# Altium PCB AMPURR.PcbDoc (part 4 of 6)
Units mm, origin at the board's own origin, x right, y up, seen from the top; angles counter-clockwise.
Board outline 100 x 100 mm, 4 copper layers (Top Layer, GND, VDD, Bottom Layer), stack 1.586 mm thick; 522 components, 281 nets, 1527 pads, 2431 vias.
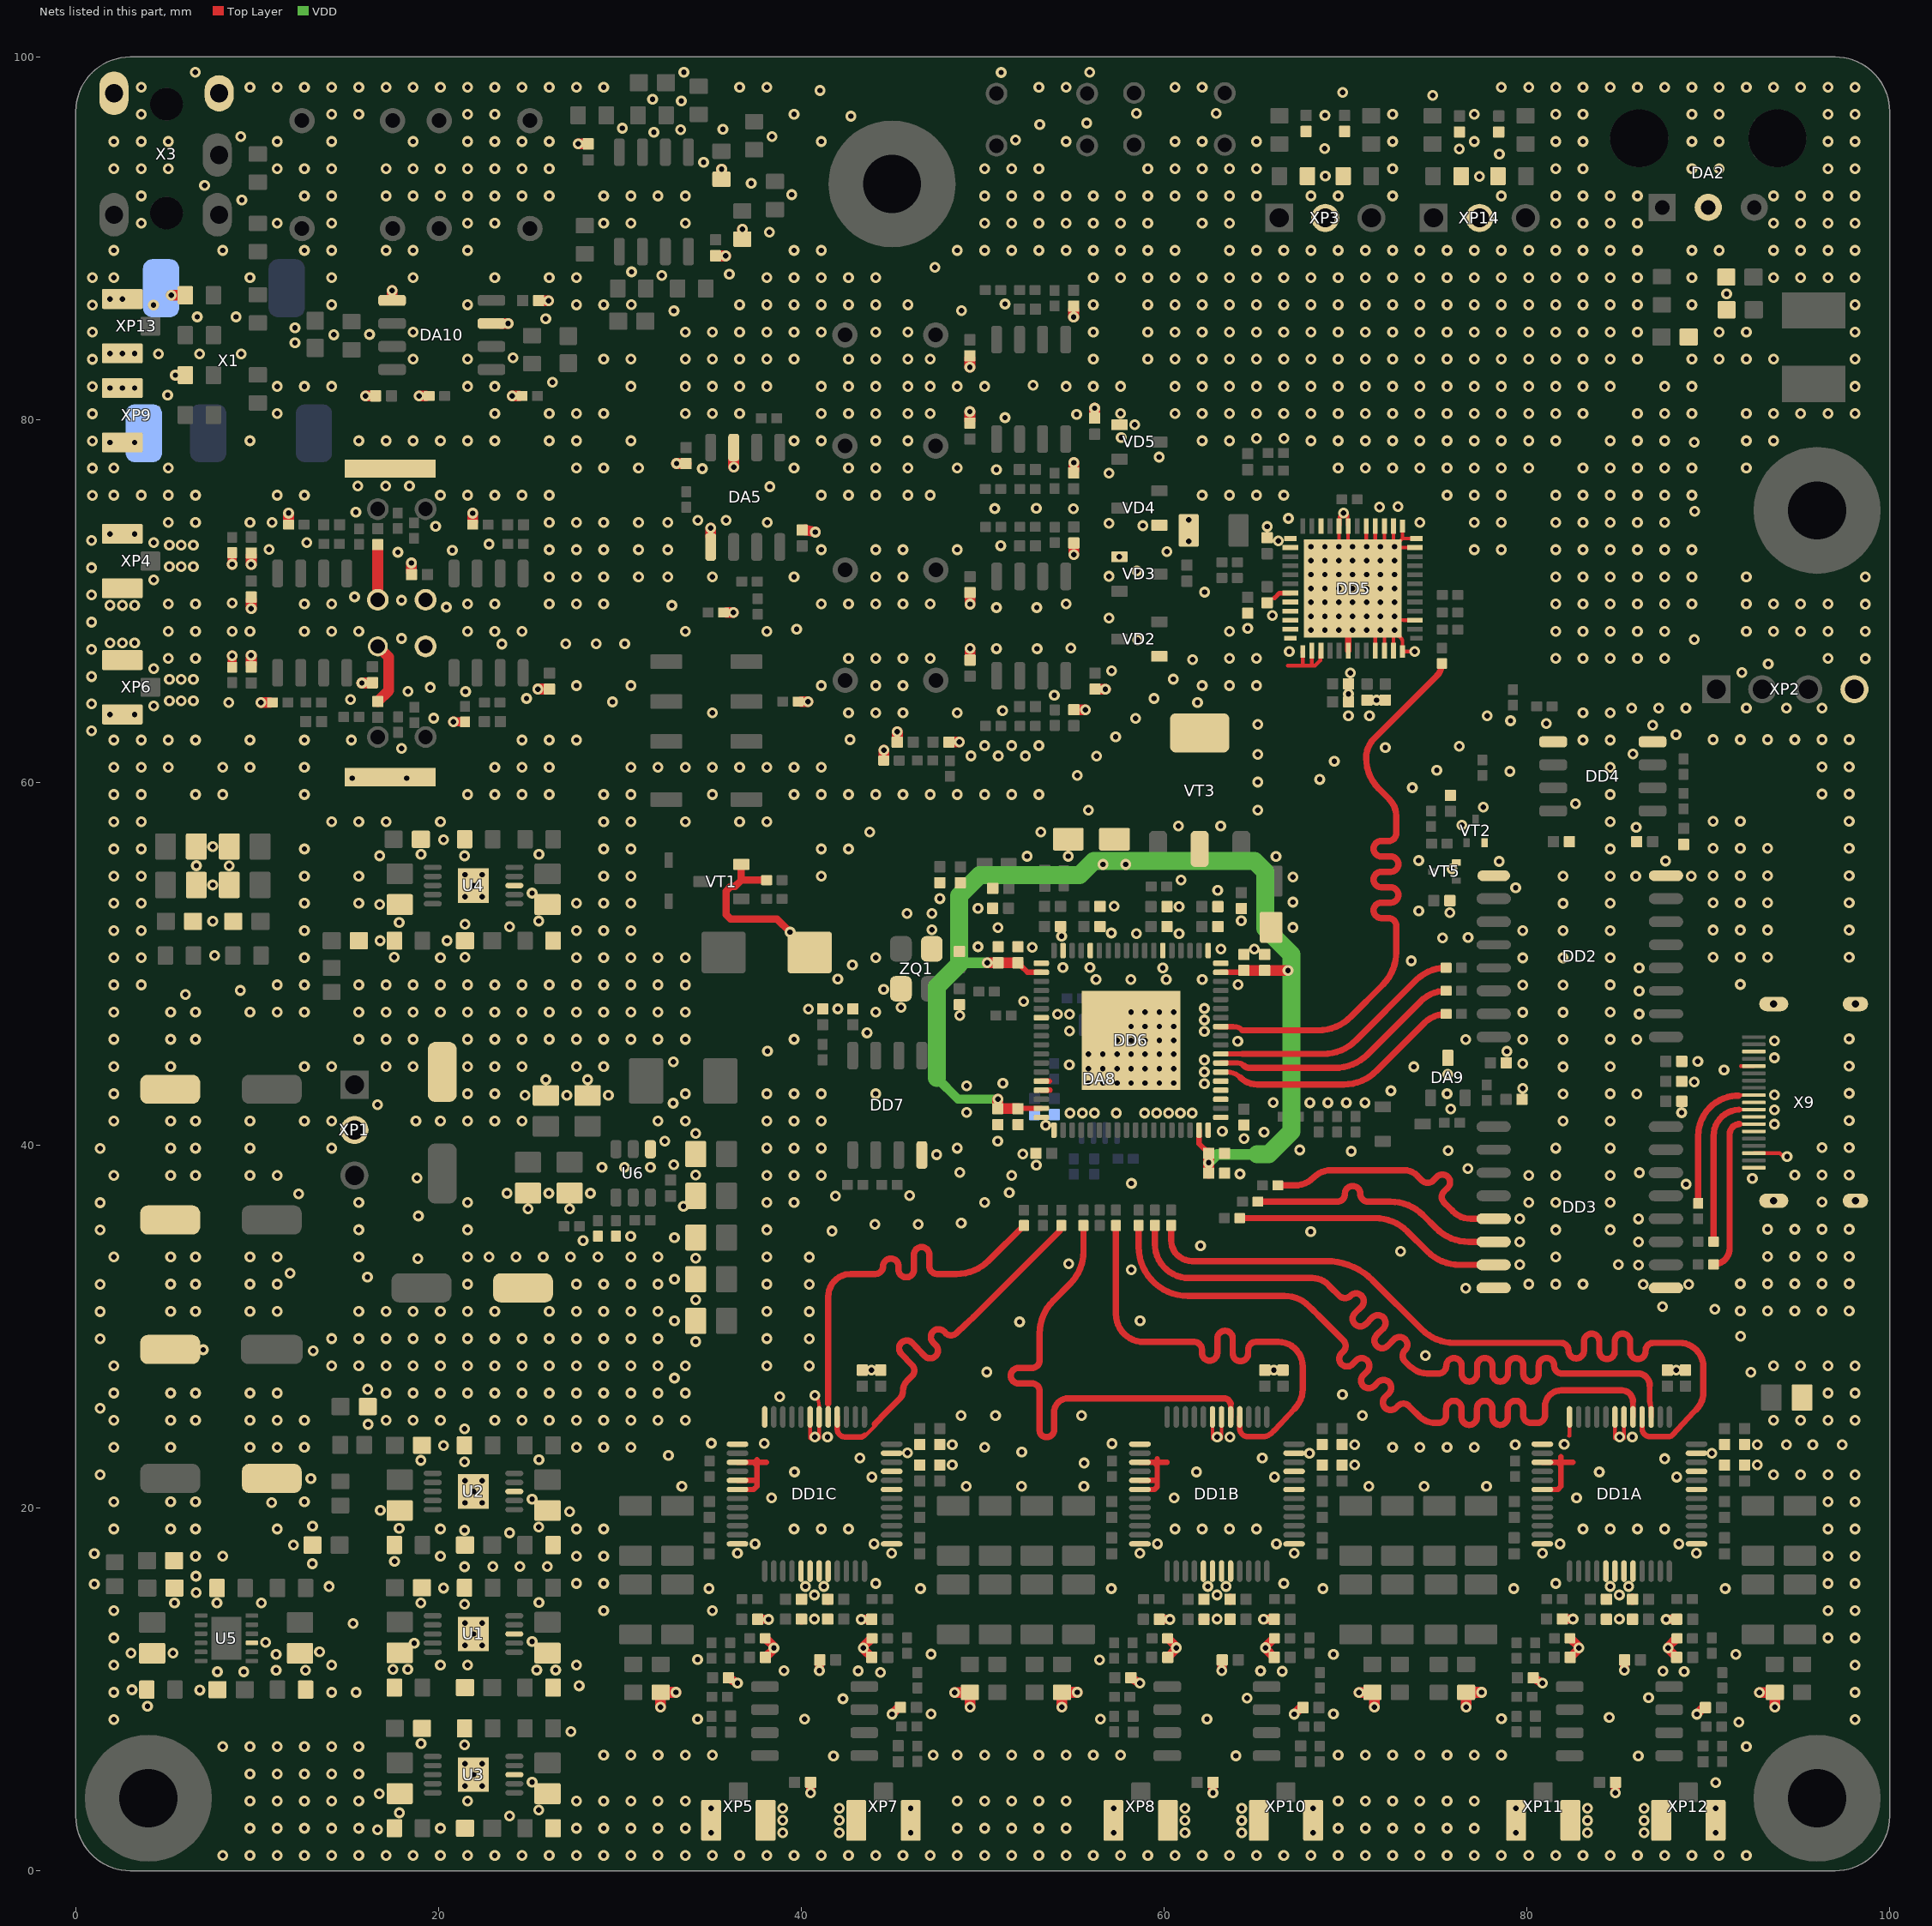
[diagram p5: the nets of this part, all layers, seen from the top]

## Via types
v1: diameter 0.6, hole 0.3, Top Layer to Bottom Layer, tented both sides, 2431 vias

## Nets (pads, with @x,y where several pads share a name; then routed paths per layer and width w, separated by ;. In a path a pad name is that pad's centre, name@x,y a point inside that pad or via, vN(x,y) a via of type N, cw(c..) or ccw(c..) an arc to the next point about the centre after c; other vN are vias at no path point) (continued)
DAC_BCK_2: DD1A.3 R89.1 | length 45.2
  Top Layer w0.3: 86.776,26.753 86.776,25.936 ccw(c87.406,25.936) 86.788,25.814 86.856,25.469 DD1A.3@86.856,25.019
  Top Layer w0.35: R89.1@59.491,35.576 59.491,34.561 ccw(c61.374,34.561) 61.374,32.678 68.16,32.678 68.162,32.678 cw(c68.161,31.417) 69.053,32.309 69.055,32.307 69.12,32.242 69.669,31.693 ccw(c69.97,31.993) 70.27,31.693 70.284,31.706 cw(c70.584,31.406) 70.885,31.706 cw(c70.584,31.406) 70.885,31.105 70.518,30.738 ccw(c70.818,30.438) 70.518,30.137 ccw(c70.818,30.438) 71.119,30.137 71.486,30.504 cw(c71.786,30.204) 72.087,30.504 cw(c71.786,30.204) 72.087,29.903 71.72,29.536 ccw(c72.021,29.236) 71.72,28.935 ccw(c72.021,29.236) 72.321,28.935 72.688,29.302 cw(c72.988,29.002) 73.289,29.302 cw(c72.988,29.002) 73.289,28.701 73.275,28.688 ccw(c73.576,28.387) 73.275,28.086 73.536,27.826 73.537,27.825 73.936,27.545 ccw(c74.533,28.821) 74.114,27.476 ccw(c74.533,28.821) 74.501,27.413 ccw(c74.533,28.821) 74.533,27.412 74.676,27.412 75.132,27.412 ccw(c75.132,27.837) 75.557,27.837 cw(c75.982,27.837) 75.982,28.262 cw(c75.982,27.837) 76.407,27.837 76.407,27.396 ccw(c76.832,27.396) 76.832,26.971 ccw(c76.832,27.396) 77.257,27.396 77.257,27.849 cw(c77.682,27.849) 77.682,28.274 cw(c77.682,27.849) 78.107,27.849 78.107,27.396 ccw(c78.532,27.396) 78.532,26.971 ccw(c78.532,27.396) 78.957,27.396 78.957,27.849 cw(c79.382,27.849) 79.382,28.274 cw(c79.382,27.849) 79.807,27.849 79.807,27.396 ccw(c80.232,27.396) 80.232,26.971 ccw(c80.232,27.396) 80.657,27.396 80.657,27.849 cw(c81.082,27.849) 81.082,28.274 cw(c81.082,27.849) 81.507,27.849 81.507,27.837 ccw(c81.932,27.837) 81.932,27.412 82.782,27.412 82.957,27.412 86.117,27.412 cw(c86.117,26.753) 86.776,26.753
DAC_BCK_3: DD3.6 R86.1 | length 14.7
  Top Layer w0.35: R86.1@65.172,36.889 69.369,36.889 69.544,36.889 ccw(c69.544,37.314) 69.969,37.314 69.969,37.327 cw(c70.394,37.327) 70.394,37.752 cw(c70.394,37.327) 70.819,37.327 70.819,37.314 ccw(c71.244,37.314) 71.244,36.889 71.899,36.889 72.484,36.889 cw(c72.484,34.349) 74.28,36.145 75.006,35.418 ccw(c76.802,37.214) 76.802,34.674 DD3.6@78.171,34.674
DAC_DIN_0: DD1C.4 R94.1 | length 22.8
  Top Layer w0.2: 43.27,23.918 ccw(c43.27,24.357) 43.581,24.046 44.109,24.575
  Top Layer w0.3: DD1C.4@41.98,25.019 41.98,24.344 ccw(c42.407,24.344) 42.407,23.918 43.27,23.918 ccw(c43.27,24.215) 43.48,24.005
  Top Layer w0.35: 44.055,24.63 44.692,25.297 45.425,26.03 ccw(c44.998,26.457) 45.602,26.457 cw(c46.38,26.457) 45.83,27.007 45.972,27.149 46.096,27.273 46.104,27.281 ccw(c45.803,27.582) 46.112,27.874 45.504,28.516 cw(c45.813,28.808) 45.521,29.117 cw(c45.813,28.808) 46.121,29.1 46.8,28.384 ccw(c47.109,28.676) 47.401,28.367 ccw(c47.109,28.676) 47.417,28.968 47.255,29.139 cw(c47.564,29.431) 47.272,29.74 cw(c47.564,29.431) 47.873,29.723 47.944,29.648 ccw(c48.253,29.94) 48.545,29.631 49.067,30.125 49.194,30.246 49.501,30.536 54.183,35.218 ccw(c53.825,35.576) R94.1@54.331,35.576
DAC_DIN_1: DD1B.4 R91.1 | length 27.8
  Top Layer w0.3: DD1B.4@64.168,25.019 64.168,24.388 ccw(c64.625,24.388) 64.625,23.93 65.427,23.93 ccw(c65.427,24.656) 65.94,24.143 66.074,24.277 67.196,25.474
  Top Layer w0.35: 57.347,30.684 ccw(c58.877,30.684) 58.877,29.155 60.371,29.155 61.659,29.155 cw(c61.659,28.73) 62.084,28.73 62.084,28.548 ccw(c62.509,28.548) 62.509,28.123 ccw(c62.509,28.548) 62.934,28.548 62.934,29.344 cw(c63.359,29.344) 63.359,29.769 cw(c63.359,29.344) 63.784,29.344 63.784,28.517 ccw(c64.209,28.517) 64.209,28.092 ccw(c64.209,28.517) 64.634,28.517 64.634,28.73 cw(c65.059,28.73) 65.059,29.155 65.234,29.155 66.293,29.155 cw(c66.293,27.804) 67.644,27.804 67.644,26.556 cw(c66.113,26.556) 67.196,25.474 ; 57.347,30.685 57.342,32.297 cw(c58.067,32.301) 57.342,32.302 57.347,35.451 R91.1@57.347,35.576
DAC_DIN_2: DD1A.4 R88.1 | length 45.5
  Top Layer w0.3: DD1A.4@86.356,25.019 86.356,24.372 ccw(c86.796,24.372) 86.796,23.933 87.822,23.933 ccw(c87.822,24.233) 88.043,24.03 89.473,25.583
  Top Layer w0.35: R88.1@60.388,35.576 60.388,34.765 ccw(c61.541,34.765) 61.541,33.613 68.932,33.613 cw(c68.932,29.97) 71.508,32.546 74.206,29.847 ccw(c76.002,31.643) 76.002,29.103 78.439,29.103 81.872,29.103 cw(c81.872,28.678) 82.297,28.678 82.297,28.673 ccw(c82.722,28.673) 82.722,28.248 ccw(c82.722,28.673) 83.147,28.673 83.147,29.182 cw(c83.572,29.182) 83.572,29.607 cw(c83.572,29.182) 83.997,29.182 83.997,28.633 ccw(c84.422,28.633) 84.422,28.208 ccw(c84.422,28.633) 84.847,28.633 84.847,29.182 cw(c85.272,29.182) 85.272,29.607 cw(c85.272,29.182) 85.697,29.182 85.697,28.633 ccw(c86.122,28.633) 86.122,28.208 ccw(c86.122,28.633) 86.547,28.633 86.547,28.678 cw(c86.972,28.678) 86.972,29.103 87.147,29.103 88.413,29.103 cw(c88.413,27.795) 89.338,28.72 cw(c88.403,27.77) 89.736,27.77 89.736,26.382 cw(c88.391,26.382) 89.342,25.431
DAC_DIN_3: DD3.5 R85.1 | length 14.7
  Top Layer w0.35: R85.1@66.272,37.785 67.192,37.785 ccw(c67.192,39.265) 68.239,38.219 cw(c69.221,37.236) 69.221,38.625 73.219,38.625 73.221,38.625 cw(c73.221,37.582) 73.96,38.319 74.107,38.171 74.22,38.059 74.231,38.048 ccw(c74.531,38.348) 74.832,38.048 75.042,38.258 cw(c75.343,37.958) 75.643,38.258 cw(c75.343,37.958) 75.643,37.657 75.433,37.447 ccw(c75.734,37.146) 75.433,36.846 75.767,36.512 75.891,36.388 ; 75.891,36.388 75.924,36.354 ; 75.929,36.349 ccw(c76.907,37.327) 76.907,35.944 DD3.5@78.171,35.944
DAC_LRCK_0: DD1C.5 R96.1 | length 22.7
  Top Layer w0.2: DD1C.5@41.48,25.019 41.48,25.753
  Top Layer w0.35: 41.48,25.753 41.48,31.649 cw(c42.735,31.649) 42.249,32.806 cw(c42.735,31.649) 42.424,32.865 42.735,32.904 44.083,32.904 ccw(c44.083,33.329) 44.508,33.329 cw(c44.933,33.329) 44.933,33.754 cw(c44.933,33.329) 45.358,33.329 45.358,33.144 ccw(c45.783,33.144) 45.783,32.719 ccw(c45.783,33.144) 46.208,33.144 46.208,33.958 cw(c46.633,33.958) 46.633,34.383 cw(c46.633,33.958) 47.058,33.958 47.058,33.329 ccw(c47.483,33.329) 47.483,32.904 48.508,32.904 48.546,32.904 ccw(c48.546,35.444) 50.342,33.648 R96.1@52.27,35.576
DAC_LRCK_1: DD1B.5 R93.1 | length 27.8
  Top Layer w0.3: DD1B.5@63.668,25.019 63.668,25.753
  Top Layer w0.35: 53.139,24.658 53.139,24.266 ccw(c53.488,24.266) 53.488,23.917 53.56,23.917 ccw(c53.56,24.288) 53.932,24.288 53.932,25.263 cw(c54.713,25.263) 54.713,26.044 63.31,26.044 cw(c63.31,25.694) 63.633,25.829 63.658,25.77 cw(c63.168,25.469) 63.668,25.753 ; 53.138,24.665 53.138,26.269 53.138,26.444 ccw(c52.713,26.444) 52.713,26.869 51.969,26.869 cw(c51.969,27.294) 51.544,27.294 cw(c51.969,27.294) 51.969,27.719 52.713,27.719 ccw(c52.713,28.144) 53.138,28.144 53.138,29.169 53.138,29.625 cw(c55.678,29.625) 53.882,31.421 54.811,32.35 ccw(c53.015,34.147) 55.555,34.147 R93.1@55.555,35.576
DAC_LRCK_2: DD1A.5 R90.1 | length 45.2
  Top Layer w0.3: DD1A.5@85.856,25.019 85.856,25.862
  Top Layer w0.35: R90.1@58.595,35.576 58.595,34.405 ccw(c61.311,34.405) 61.311,31.689 66.321,31.689 66.642,31.689 cw(c66.642,29.782) 67.991,31.131 68.216,30.905 68.39,30.732 68.513,30.608 69.888,29.233 cw(c69.588,28.933) 69.888,28.632 69.783,28.528 ccw(c70.084,28.227) 69.783,27.927 ccw(c70.084,28.227) 70.385,27.927 70.594,28.136 cw(c70.895,27.836) 71.195,28.136 cw(c70.895,27.836) 71.195,27.535 70.986,27.326 ccw(c71.286,27.025) 70.986,26.725 ccw(c71.286,27.025) 71.587,26.725 71.796,26.934 cw(c72.097,26.634) 72.397,26.934 cw(c72.097,26.634) 72.397,26.333 72.188,26.124 ccw(c72.488,25.823) 72.188,25.522 ccw(c72.488,25.823) 72.789,25.522 72.893,25.627 cw(c73.194,25.327) 73.494,25.627 73.618,25.503 74.07,25.052 ccw(c74.956,25.938) 74.738,24.704 ccw(c74.956,25.938) 74.913,24.686 74.956,24.685 75.126,24.685 ccw(c75.126,25.11) 75.551,25.11 75.551,25.486 cw(c75.976,25.486) 75.976,25.911 cw(c75.976,25.486) 76.401,25.486 76.401,25.005 ccw(c76.826,25.005) 76.826,24.58 ccw(c76.826,25.005) 77.251,25.005 77.251,25.486 cw(c77.676,25.486) 77.676,25.911 cw(c77.676,25.486) 78.101,25.486 78.101,25.005 ccw(c78.526,25.005) 78.526,24.58 ccw(c78.526,25.005) 78.951,25.005 78.951,25.486 cw(c79.376,25.486) 79.376,25.911 cw(c79.376,25.486) 79.801,25.486 79.801,25.11 ccw(c80.226,25.11) 80.226,24.685 80.562,24.685 80.674,24.699 ccw(c80.562,25.124) 80.849,24.791 ccw(c80.562,25.124) 81.001,25.124 81.001,25.59 cw(c81.895,25.59) 81.895,26.484 85.235,26.484 cw(c85.235,25.862) 85.856,25.862
DAC_LRCK_3: DD3.7 R87.1 | length 14.8
  Top Layer w0.35: R87.1@64.175,35.984 71.628,35.984 cw(c71.628,33.444) 73.424,35.24 74.516,34.148 ccw(c76.312,35.944) 76.312,33.404 DD3.7@78.171,33.404
DVDD: C120.2 C122.2 C123.1 C128.1 C129.1 C138.2 C139.2 C142.2 C143.2 DD6.20 DD6.35 DD6.53 DD6.71 VT3.2 | length 66.5
  Top Layer w0.3: C138.2@51.947,50.055 52.104,49.898 52.104,49.892 52.462,49.534 DD6.20@53.229,49.534 ; C142.2@52.03,42.034 DD6.35@53.229,42.034 ; DD6.53@61.929,40.834 61.929,40.088 62.443,39.574 62.471,39.574 C128.1@62.464,39.567 ; DD6.71@63.129,49.534 C122.2@64.443,49.534
  Top Layer w0.6: v1(50.243,50.057) 51.943,50.057 C138.2@51.944,50.058 ; C143.2@50.83,42.034 50.83,42.532 v1(50.834,42.536) ; C143.2@50.842,42.029 C142.2@51.936,42.029 ; C129.1@62.457,38.459 62.455,38.461 v1(62.455,39.035) 62.455,39.549 62.464,39.557 C128.1@62.464,39.567 ; C122.2@64.404,49.64 v1@66.806,49.64
  VDD w0.5: 47.471,43.713 48.64,42.543 50.827,42.543 v1(50.834,42.536)
  VDD w0.6: 48.595,50.054 50.24,50.054 v1(50.243,50.057) ; v1(62.455,39.035) 62.919,39.499 65.134,39.499
  VDD w1: 47.471,43.713 47.471,48.752 48.692,49.973 48.692,53.754 49.826,54.888 55.351,54.888 56.132,55.67 56.627,55.67 57.889,55.67 64.995,55.67 65.581,55.084 65.581,51.96 67.017,50.524 67.017,49.64 67.017,40.749 65.767,39.499 65.134,39.499
  other v1: 66.833,49.64 56.627,55.485 57.889,55.485
ESP32_BCLK: R27.2 X9.11 | length 8.9
  Top Layer w0.2: 91.683,41.961 91.683,41.963 X9.11@92.517,41.963
  Top Layer w0.35: R27.2@90.296,34.684 90.296,40.514 cw(c91.744,40.514) 91.683,41.961
ESP32_DIN: R26.2 X9.9 | length 8
  Top Layer w0.2: 91.746,42.761 X9.9@92.496,42.761
  Top Layer w0.35: R26.2@89.446,36.792 89.446,40.515 cw(c91.67,40.515) 91.305,42.709 cw(c91.67,40.515) 91.67,42.739
ESP32_LRCLK: R28.2 X9.13 | length 9.3
  Top Layer w0.2: 91.751,41.17 92.017,41.163 X9.13@92.517,41.163
  Top Layer w0.35: R28.2@90.296,33.43 ccw(c90.296,34.316) 91.181,34.316 91.181,40.6 cw(c91.751,40.6) 91.612,41.153 cw(c91.697,40.813) 91.712,41.163
GND: C1A.2 C1B.2 C1C.2 C2A.2 C2B.2 C2C.2 C9A.2 C9B.2 C9C.2 C10A.2 C10B.2 C10C.2 C11A.2 C11B.2 C11C.2 C12A.1 C12B.1 C12C.1 C13A.2 C13B.2 C13C.2 C14A.2 C14B.2 C14C.2 C16A.1 C16B.1 C16C.1 C17A.2 C17B.2 C17C.2 C18A.2 C18B.2 C18C.2 C19A.1 C19B.1 C19C.1 C20A.1 C20B.1 C20C.1 C22A.1 C22B.1 C22C.1 C24A.2 C24B.2 C24C.2 C25A.1 C25B.1 C25C.1 C31A.1 C31B.1 C31C.1 C32A.2 C32B.2 C32C.2 C33.2 C34.2 C37.2 C39.1 C41.1 C42.1 C44.1 C45.1 C46.2 C47.2 C48.1 C49.2 C50.2 C51.2 C52.2 C53.1 C54.2 C55.1 C56.2 C57.2 C58.2 C59.2 C60.2 C61.1 C62.2 C63.2 C64.1 C65.2 C66.1 C67.2 C68.1 C69.1 C71.1 C72.2 C73.2 C74.2 C75.2 C76.2 C77.2 C78.2 C79.2 C80.2 C81.2 C84.2 C85.2 C86.1 C87.1 C88.1 C89.2 C90.2 C91.1 C92.2 C93.1 C94.1 C95.1 C96.2 C97.1 C98.2 C102.2 C103.1 C104.2 C105.1 C109.1 C110.1 C111.2 C114.2 C115.1 C116.1 C117.2 C118.1 C119.2 C120.1 C121.2 C122.1 C123.2 C124.2 C125.2 C126.1 C127.2 C128.2 C129.2 C130.2 C131.2 C132.2 C133.1 C134.2 C135.2 C138.1 C139.1 C140.1 C141.1 C142.1 C143.1 C144.1 C145.1 C146.1 C147.2 C148.2 C149.1 C150.1 C151.1 C152.1 C154.1 C155.2 C156.1 C158.1 C160.1 C161.2 C162.1 C164.2 C165.2 C166.1 C167.1 C168.1 C170.2 C171.2 C172.1 C173.1 C174.2 C175.2 C187.2 C188.2 C189.2 C190.2 C191.1 C192.1 C193.1 DA2.2 DA5.3 DA5.5 DA8.4 DA9.3 DA10.3 DA10.5 DD1A.6 DD1A.7 DD1A.12 DD1A.13 DD1A.15 DD1A.18 DD1A.24 DD1A.29 DD1A.30 DD1A.31 DD1A.32 DD1A.37 DD1A.43 DD1A.45 DD1A.47 DD1B.6 DD1B.7 DD1B.13 DD1B.15 DD1B.17 DD1B.18 DD1B.24 DD1B.29 DD1B.30 DD1B.31 DD1B.32 DD1B.37 DD1B.43 DD1B.45 DD1B.47 DD1C.6 DD1C.7 DD1C.12 DD1C.13 DD1C.15 DD1C.17 DD1C.18 DD1C.24 DD1C.29 DD1C.30 DD1C.31 DD1C.32 DD1C.37 DD1C.43 DD1C.45 DD1C.47 DD2.9 DD3.8 DD4.5 DD5.1 DD5.2 DD5.7 DD5.8 DD5.9 DD5.10 DD5.11 DD5.12 DD5.13 DD5.14 DD5.15 DD5.18 DD5.21 DD5.22 DD5.23 DD5.24 DD5.27 DD5.35 DD5.36 DD5.37 DD5.38 DD5.39 DD5.40 DD5.41 DD5.43 DD5.44 DD5.46 DD5.49 DD6.1 DD6.6 DD6.14 DD6.17 DD6.19 DD6.25 DD6.32 DD6.33 DD6.36 DD6.37 DD6.54 DD6.55 DD6.72 DD6.73 DD7.4 E1.1 R2A.2 R2B.2 R2C.2 R5A.1 R5B.1 R5C.1 R15A.1 R15B.1 R15C.1 R18A.2 R18B.2 R18C.2 R21.2 R34.1 R35.1 R36.1 R37.1 R38.1 R39.1 R42.2 R43.1 R44.1 R45.1 R46.1 R47.1 R48.2 R49.2 R50.1 R54.2 R63.2 R69.1 R81.1 R115.1 R117.1 R118.1 R123.1 R125.1 R126.1 R130.1 R135.1 R138.2 R139.1 R146.2 R147.2 R153.2 R154.2 R169.1 R172.1 R173.2 U1.8 U1.11 U2.8 U2.11 U3.8 U3.11 U4.8 U4.11 U5.9 U6.1 VD2.1 VD3.1 VD4.1 VD5.1 VT1.2 VT2.2 VT5.2 X1.1 X1.2 X3.1 XP1.2 XP2.4 XP3.2 XP4.2 XP5.2 XP6.2 XP7.2 XP8.2 XP9.2 XP10.2 XP11.2 XP12.2 XP13.2 XP14.2 ZQ1.2 ZQ1.4 | length 126.9
  Top Layer w0.2: DD1C.7@40.48,25.019 40.48,23.847 40.974,23.847 40.977,23.85 40.977,25.016 DD1C.6@40.98,25.019 40.98,25.634 ccw(c40.176,25.634) v1(40.744,26.202) ; DD1B.7@62.668,25.019 62.668,23.847 v1@63.162,23.847 ; v1@63.002,23.847 v1@63.162,23.847 ; DD1B.6@63.168,25.019 63.165,25.016 63.165,23.85 v1@63.162,23.847 ; 66.819,66.441 67.611,66.441 ; DD5.13@67.613,67.184 DD5.13@67.648,67.219 67.648,66.478 67.611,66.441 ; DD5.49@67.798,73.301 v1(68.095,73.003) ; DD5.14@68.148,67.266 68.148,66.467 68.121,66.441 ; DD5.15@68.648,67.266 68.613,67.231 68.613,66.728 68.326,66.441 68.121,66.441 ; DD5.49@69.648,73.003 DD5.44@69.648,74.135 69.683,74.17 69.683,74.66 69.874,74.851 v1(69.888,74.851) ; v1@69.951,74.914 70.113,74.752 70.113,74.17 DD5.43@70.148,74.135 DD5.49@70.148,70.951 ; DD5.49@70.117,70.981 v1(70.398,70.701) ; DD5.41@71.148,74.135 71.148,73.02 v1(71.165,73.003) ; DD5.49@71.404,69.694 ccw(c73.2,71.491) 73.2,68.951 DD5.27@73.833,68.951 ; DD5.21@71.648,67.266 DD5.49@71.648,69.451 ; DD5.49@71.648,71.951 DD5.40@71.648,74.136 ; DD5.22@72.148,67.266 DD5.49@72.148,68.398 ; DD5.49@72.148,73.003 DD5.39@72.148,74.136 ; DD5.23@72.648,67.266 DD5.49@72.648,68.451 ; DD5.38@72.648,74.135 72.648,72.951 72.998,73.301 73.148,73.451 ; DD5.49@72.771,68.113 cw(c72.771,67.737) 73.148,67.737 DD5.24@73.148,67.219 v1@73.815,67.219 ; DD5.49@72.875,72.982 ccw(c72.95,73.057) 72.95,72.951 DD5.35@73.833,72.951 ; DD5.37@73.148,74.136 73.148,73.451 ; DD5.36@73.833,73.451 73.148,73.451 ; 82.328,23.969 82.356,23.969 DD1A.12@82.356,25.019 ; 84.856,24.181 DD1A.7@84.856,25.019 84.856,23.847 v1@85.351,23.847 ; v1@85.19,23.847 v1@85.351,23.847 ; DD1A.6@85.356,25.019 85.353,25.016 85.353,23.85 v1@85.351,23.847 ; 67.611,66.441 68.121,66.441
  Top Layer w0.25: 66.09,70.176 66.355,70.44 66.953,70.44 DD5.7@66.963,70.45
  Top Layer w0.3: DD1C.18@36.48,21.019 37.372,21.019 37.548,21.195 37.548,21.519 ; DD1C.17@36.48,21.519 37.548,21.519 ; DD1C.15@36.48,22.519 37.372,22.519 ; 37.548,22.661 37.548,21.931 ; 38.07,22.519 37.372,22.519 ; C138.1@51.944,50.909 C138.1@51.944,50.938 ; DD6.33@53.229,43.034 53.713,43.034 ; DD6.32@53.229,43.534 53.675,43.534 ; DD1B.18@58.668,21.019 59.466,21.019 59.621,21.174 59.621,21.519 ; DD1B.17@58.668,21.519 59.621,21.519 ; DD1B.15@58.668,22.519 60.163,22.519 ; 59.446,22.519 59.621,22.343 ; 59.621,22.717 59.621,22.343 ; DD1A.18@80.856,21.019 81.709,21.019 81.885,21.195 81.885,22.343 ; 81.885,22.819 81.885,22.343 ; 82.545,22.519 DD1A.15@80.856,22.519 81.709,22.519 81.885,22.343 ; 37.372,22.519 37.548,22.343 37.548,21.931 ; 37.548,21.519 37.548,21.931 ; 59.621,21.519 59.621,22.343
  Top Layer w0.35: DD5.49@70.148,70.451 v1(70.398,70.701)
  Top Layer w0.36: DD5.18@70.148,67.266 DD5.49@70.148,70.451
  Top Layer w0.4: VT1.2@36.687,55.485 36.687,54.612 ; R21.2@38.087,54.612 36.687,54.612 ; v1(39.381,51.751) 38.661,52.472 36.091,52.472 35.857,52.706 35.857,53.154 35.857,54.016 36.106,54.265 36.34,54.265 36.687,54.612
  Top Layer w0.5: R115.1@8.616,66.501 v1(8.616,66.99) ; v1(8.616,72.031) R123.1@8.616,72.521 ; v1(20.823,63.342) R118.1@21.312,63.342 ; C22C.1@35.979,10.635 35.982,10.626 v1(36.48,10.338) ; C24C.2@37.614,13.866 37.605,13.864 37.611,13.858 v1(38.187,13.858) ; R15C.1@38.001,12.814 38.026,12.814 38.47,12.37 38.47,12.304 v1(38.489,12.285) 38.47,12.266 38.47,12.218 C25C.1@38.016,11.764 ; v1(40.504,4.29) 40.504,4.866 C31C.1@40.511,4.872 ; v1(40.99,11.033) 41.003,11.046 41.003,11.609 C32C.2@41.015,11.622 ; v1(43.303,13.858) 43.879,13.858 C11C.2@43.885,13.864 C11C.2@43.876,13.866 ; C12C.1@43.885,11.764 43.431,12.218 43.431,12.266 v1(43.412,12.285) 43.431,12.304 43.431,12.37 43.875,12.814 R5C.1@43.9,12.814 ; v1(44.993,8.631) 45.4,9.038 C16C.1@45.409,9.038 ; C22B.1@58.17,10.626 v1(58.668,10.338) ; C24B.2@59.743,13.866 C24B.2@59.734,13.864 59.74,13.858 v1(60.316,13.858) ; R15B.1@60.184,12.819 60.209,12.819 60.653,12.375 60.653,12.309 v1(60.672,12.29) 60.653,12.271 60.653,12.223 C25B.1@60.199,11.769 ; v1(62.692,4.29) C31B.1@62.692,4.866 ; v1(63.178,11.034) 63.19,11.047 63.19,11.609 C32B.2@63.197,11.616 ; v1@65.486,13.863 66.062,13.863 66.068,13.869 C11B.2@66.059,13.871 ; C12B.1@66.068,11.769 65.614,12.223 65.614,12.271 v1(65.595,12.29) 65.614,12.309 65.614,12.375 66.058,12.819 R5B.1@66.083,12.819 ; v1(67.181,8.631) C16B.1@67.588,9.038 ; C22A.1@80.358,10.626 v1(80.857,10.338) ; C24A.2@81.975,13.888 C24A.2@81.966,13.885 81.972,13.879 v1(82.548,13.879) ; R15A.1@82.377,12.814 82.402,12.814 82.846,12.37 82.846,12.304 v1(82.865,12.285) 82.846,12.266 82.846,12.218 C25A.1@82.392,11.764 ; v1(84.881,4.29) C31A.1@84.881,4.866 ; v1(85.381,11.049) 85.386,11.054 C32A.2@85.386,11.616 ; v1(87.679,13.858) 88.255,13.858 C11A.2@88.261,13.864 C11A.2@88.253,13.866 ; C12A.1@88.261,11.764 87.807,12.218 87.807,12.266 v1(87.788,12.285) 87.807,12.304 87.807,12.37 88.251,12.814 R5A.1@88.276,12.814 ; v1(89.369,8.631) C16A.1@89.776,9.038
  Top Layer w0.6: v1(5.264,86.86) R153.2@5.638,86.86 ; v1(5.484,82.459) R146.2@5.858,82.459 ; v1(8.616,66.99) v1@8.618,66.988 ; v1(8.616,72.031) v1@8.618,72.033 ; v1@9.668,67.003 v1(9.666,67.005) 9.666,66.515 C152.1@9.671,66.51 ; v1@9.668,69.589 v1(9.666,69.586) 9.666,70.076 C167.1@9.671,70.081 ; v1@9.668,72.019 v1(9.666,72.017) 9.666,72.506 C158.1@9.671,72.511 ; v1@10.201,64.411 v1(10.199,64.409) R117.1@10.688,64.409 ; R126.1@11.725,74.355 11.73,74.36 v1(11.73,74.85) v1@11.728,74.847 ; v1@15.767,65.488 16.341,65.488 C165.2@16.351,65.498 ; v1(15.973,81.307) C171.2@16.347,81.307 ; C155.2@16.646,64.466 17.253,65.073 17.253,66.898 C154.1@16.646,67.506 ; C160.1@16.646,70.073 C161.2@16.646,73.115 ; DA10.5@17.429,86.756 v1(17.429,87.13) ; C166.1@18.5,71.61 18.505,71.615 v1(18.505,72.104) v1@18.503,72.102 ; v1(18.927,81.307) R154.2@19.302,81.307 ; v1(20.823,63.342) v1@20.825,63.34 ; v1(21.875,74.848) 21.875,74.361 R125.1@21.876,74.36 ; DA10.3@23.455,85.303 v1(23.829,85.303) ; v1(24.048,81.307) R147.2@24.422,81.307 ; v1@25.478,65.147 v1(25.475,65.149) 25.965,65.149 C164.2@25.97,65.144 ; C173.1@25.694,86.566 v1(26.068,86.566) ; v1(27.692,95.205) C170.2@28.066,95.205 ; v1(32.238,9.024) 32.238,9.827 R18C.2@32.244,9.833 32.248,9.837 v1(33.088,9.837) ; v1(33.118,77.586) 33.641,77.586 C98.2@33.646,77.58 ; DA5.5@35.001,73.553 v1(35.001,74.029) ; C172.1@35.448,89.034 v1(35.822,89.034) ; R169.1@35.6,93.437 v1(35.6,93.811) ; R69.1@35.884,69.366 v1(36.259,69.366) ; DA5.3@36.269,78.467 36.269,77.381 v1(36.27,77.38) ; R135.1@36.751,90.137 v1(36.751,90.511) ; R81.1@39.999,64.458 v1(40.374,64.458) ; C87.1@40.224,73.925 v1(40.767,73.806) ; v1(44.544,61.783) 44.55,61.776 R63.2@44.55,61.45 ; v1@45.285,62.803 45.292,62.797 C93.1@45.292,62.471 ; C94.1@48.138,62.229 v1(48.712,62.229) ; v1(48.453,9.829) 49.293,9.829 49.303,9.819 v1(49.303,9.016) ; v1@49.293,80.448 v1(49.29,80.45) 49.29,79.961 C103.1@49.295,79.956 ; v1(49.29,82.892) v1(49.29,82.892) 49.29,83.382 C96.2@49.295,83.387 ; v1@49.3,67.382 v1(49.298,67.384) 49.298,66.894 C115.1@49.303,66.89 ; v1@49.3,69.833 v1(49.298,69.831) 49.298,70.32 C92.2@49.303,70.325 ; v1(54.357,9.02) 54.357,9.823 R18B.2@54.367,9.833 v1(55.207,9.833) ; C90.2@55.008,86.056 55.012,86.051 v1(55.012,85.663) ; v1(55.016,77.635) 55.016,77.211 C102.2@55.028,77.2 ; v1@55.023,72.572 v1(55.021,72.569) 55.021,73.059 C111.2@55.026,73.064 ; C114.2@55.165,64.016 55.169,64.011 v1(55.659,64.011) v1@55.657,64.013 ; C88.1@56.168,80.264 v1(56.168,80.638) ; C86.1@56.43,65.14 56.756,65.14 v1(56.763,65.146) ; v1(70.745,9.829) 71.585,9.829 71.595,9.819 v1(71.595,9.016) ; v1(76.649,9.02) 76.649,9.823 76.659,9.833 v1(77.499,9.833) ; v1(92.829,9.829) 93.669,9.829 93.679,9.819 v1(93.679,9.016)
  other v1: 8.1,0.839 9.6,0.839 11.1,0.839 12.6,0.839 14.1,0.839 15.6,0.839 17.1,0.839 18.6,0.839 20.1,0.839 21.6,0.839 23.1,0.839 24.6,0.839 26.1,0.839 27.6,0.839 29.1,0.839 30.6,0.839 32.1,0.839 33.6,0.839 35.1,0.839 36.6,0.839 38.1,0.839 39.6,0.839 41.1,0.839 42.6,0.839 44.1,0.839 45.6,0.839 47.1,0.839 48.6,0.839 50.1,0.839 51.6,0.839 53.1,0.839 54.6,0.839 56.1,0.839 57.6,0.839 59.1,0.839 60.6,0.839 62.1,0.839 63.6,0.839 65.1,0.839 66.6,0.839 68.1,0.839 69.6,0.839 71.1,0.839 72.6,0.839 74.1,0.839 75.6,0.839 77.1,0.839 78.6,0.839 80.1,0.839 81.6,0.839 83.1,0.839 84.6,0.839 86.1,0.839 87.6,0.839 89.1,0.839 90.6,0.839 92.1,0.839 64.279,2.092 68.218,2.092 79.402,2.093 83.341,2.093 86.467,2.093 90.406,2.093 35.027,2.097 38.966,2.097 42.092,2.097 46.03,2.097 57.215,2.097 61.154,2.097 16.627,2.262 9.6,2.339 11.1,2.339 12.6,2.339 14.1,2.339 15.6,2.339 20.1,2.339 27.6,2.339 29.1,2.339 30.6,2.339 32.1,2.339 33.6,2.339 48.6,2.339 50.1,2.339 51.6,2.339 53.1,2.339 54.6,2.339 69.6,2.339 71.1,2.339 72.6,2.339 74.1,2.339 75.6,2.339 77.1,2.339 38.965,2.772 42.092,2.772 61.153,2.772 64.279,2.768 83.341,2.768 86.467,2.768 23.914,3.02 17.838,3.191 25.524,3.34 35.027,3.448 38.965,3.448 42.092,3.448 46.03,3.448 57.215,3.448 61.153,3.448 64.279,3.443 68.218,3.443 79.402,3.443 83.341,3.443 86.467,3.443 90.406,3.443 9.6,3.839 11.1,3.839 12.6,3.839 14.1,3.839 15.6,3.839 21.6,3.839 27.6,3.839 29.1,3.839 30.6,3.839 32.1,3.839 33.6,3.839 48.6,3.839 50.1,3.839 51.6,3.839 53.1,3.839 54.6,3.839 69.6,3.839 71.1,3.839 72.6,3.839 74.1,3.839 75.6,3.839 77.1,3.839 16.731,4.249 21.451,4.67 22.401,4.67 90.418,4.86 25.156,4.878 21.926,5.295 9.6,5.339 11.1,5.339 12.6,5.339 14.1,5.339 15.6,5.339 21.451,5.895 22.401,5.895 41.771,6.33 86.146,6.326 63.957,6.34 29.1,6.375 30.6,6.375 32.1,6.375 33.6,6.375 35.1,6.375 47.273,6.375 48.6,6.375 50.1,6.375 51.6,6.375 53.1,6.375 54.6,6.375 56.1,6.375 57.6,6.375 69.6,6.375 71.1,6.375 72.6,6.375 74.1,6.375 75.6,6.375 77.1,6.375 78.6,6.375 8.1,6.839 9.6,6.839 11.1,6.839 12.6,6.839 14.1,6.839 15.6,6.839 92.1,6.839 21.431,6.934 19.028,7.011 27.3,7.672 91.692,8.198 2.1,8.339 98.1,8.339 34.277,8.354 40.173,8.354 56.487,8.354 62.361,8.354 78.6,8.378 84.542,8.451 47.15,8.644 69.338,8.64 3.95,9.06 42.29,9.483 64.57,9.516 86.714,9.539 2.1,9.839 14.1,9.839 15.453,9.839 98.1,9.839 6.834,9.958 3.094,9.98 27.751,10.195 44.359,10.941 7.801,10.967 9.252,10.967 88.672,10.978 66.509,10.991 39.044,11.03 43.133,11.015 65.32,11.015 87.508,11.011 11.043,11.055 12.656,11.055 25.41,11.063 26.456,11.067 17.48,11.101 18.296,11.101 14.105,11.337 2.1,11.339 20.1,11.339 21.6,11.339 27.6,11.339 98.1,11.339 56.449,11.625 34.277,11.648 11.043,11.922 47.15,11.938 69.338,11.933 91.531,11.928 3.043,11.994 5.354,12 13.433,12.073 21.449,12.427 22.399,12.427 18.656,12.544 10.468,12.592 25.154,12.635 2.1,12.839 96.6,12.839 98.1,12.839 21.924,13.052 15.28,13.623 21.449,13.652 22.399,13.652 40.725,13.877 62.913,13.877 65.486,13.863 85.101,13.877 2.1,14.339 29.1,14.339 35.1,14.339 96.6,14.339 98.1,14.339 21.429,14.691 5.439,14.761 7.778,14.761 10.227,14.761 19.027,14.768 25.532,14.79 40.725,15.2 62.913,15.2 85.101,15.2 6.63,15.336 34.911,15.554 46.568,15.554 57.095,15.554 68.752,15.554 79.283,15.554 90.94,15.554 20.274,15.584 13.965,15.67 40.225,15.671 41.234,15.671 62.413,15.671 63.422,15.671 84.602,15.671 85.61,15.671 1.015,15.808 27.6,15.839 29.1,15.839 44.1,15.839 66.6,15.839 81.6,15.839 96.6,15.839 98.1,15.839 6.618,16.243 21.429,16.764 22.986,16.777 24.486,16.777 25.986,16.777 13.043,16.924 17.57,17.06 6.6,17.339 8.1,17.339 20.1,17.339 27.6,17.339 29.1,17.339 96.6,17.339 98.1,17.339 1.015,17.476 36.48,17.512 44.98,17.512 58.668,17.512 67.167,17.512 80.856,17.512 89.356,17.512 11.998,17.95 37.451,18.019 44.009,18.019 59.638,18.019 66.197,18.019 81.827,18.019 88.385,18.019 23.912,18.633 21.432,18.773 2.1,18.839 5.223,18.839 6.6,18.839 11.1,18.839 20.1,18.839 27.6,18.839 29.1,18.839 39.6,18.839 41.1,18.839 42.6,18.839 60.6,18.839 62.1,18.839 63.6,18.839 65.1,18.839 83.1,18.839 84.6,18.839 86.1,18.839 87.6,18.839 96.6,18.839 98.1,18.839 17.825,18.872 25.522,18.953 13.053,19 27.216,19.8 16.789,19.865 10.797,20.297 21.449,20.283 22.399,20.283 2.1,20.339 5.223,20.339 6.6,20.339 12.6,20.339 96.6,20.339 98.1,20.339 25.154,20.491 38.364,20.559 60.552,20.559 82.74,20.559 21.924,20.908 33.409,21.197 49.092,21.197 52.135,21.197 55.581,21.197 71.288,21.197 74.331,21.197 77.777,21.197 21.449,21.508 22.399,21.508 12.957,21.626 43.892,21.707 66.08,21.707 88.269,21.707 1.344,21.83 93.6,21.839 95.1,21.839 96.6,21.839 98.1,21.839 39.621,21.983 61.779,21.983 83.997,21.983 48.322,22.37 70.502,22.37 92.698,22.37 55.597,22.479 21.429,22.547 19.027,22.624 25.533,22.657 87.599,22.716 43.228,22.76 65.416,22.76 32.674,22.9 68.01,23.021 90.196,23.018 45.845,23.033 52.151,23.08 2.1,23.339 5.223,23.339 9.6,23.339 11.1,23.339 12.6,23.339 27.6,23.339 29.1,23.339 30.6,23.339 50.1,23.339 72.6,23.339 74.1,23.339 75.6,23.339 77.1,23.339 20.274,23.44 48.322,23.486 70.51,23.486 79.358,23.49 92.698,23.486 94.31,23.486 95.766,23.486 97.381,23.486 82.06,23.508 57.121,23.544 35.036,23.57 37.961,23.564 40.739,23.911 41.44,23.911 62.927,23.911 63.628,23.911 85.115,23.911 85.816,23.911 21.429,24.368 16.109,24.611 2.1,24.839 5.223,24.839 6.6,24.839 9.6,24.839 11.1,24.839 12.6,24.839 17.1,24.839 18.6,24.839 20.1,24.839 23.1,24.839 24.6,24.839 26.1,24.839 27.6,24.839 29.1,24.839 30.6,24.839 32.1,24.839 33.6,24.839 93.6,24.839 95.1,24.839 96.6,24.839 98.1,24.839 48.813,25.089 50.705,25.089 55.453,25.089 70.929,25.089 1.344,25.496 38.812,26.137 69.837,26.248 2.1,26.339 5.223,26.339 6.6,26.339 9.6,26.339 11.1,26.339 17.1,26.339 18.6,26.339 20.1,26.339 21.6,26.339 23.1,26.339 24.6,26.339 26.1,26.339 27.6,26.339 29.1,26.339 30.6,26.339 32.1,26.339 33.6,26.339 96.6,26.339 98.1,26.339 16.094,26.545 33,27.163 92.358,27.485 50.218,27.494 43.863,27.598 66.051,27.598 88.24,27.598 2.1,27.839 14.1,27.839 15.6,27.839 17.1,27.839 18.6,27.839 20.1,27.839 21.6,27.839 23.1,27.839 24.6,27.839 26.1,27.839 27.6,27.839 29.1,27.839 30.6,27.839 32.1,27.839 33.6,27.839 38.1,27.839 40.438,27.83 93.6,27.839 95.1,27.839 96.6,27.839 98.1,27.839 74.408,28.405 13.085,28.66 7.024,28.722 34.177,29.173 1.344,29.33 14.1,29.339 15.6,29.339 17.1,29.339 18.6,29.339 20.1,29.339 21.6,29.339 23.1,29.339 24.6,29.339 26.1,29.339 27.6,29.339 29.1,29.339 30.6,29.339 32.1,29.339 38.1,29.339 40.438,29.33 91.789,29.462 52.031,30.263 33,30.313 58.678,30.32 1.344,30.83 5.223,30.839 6.6,30.839 9.6,30.839 11.1,30.839 15.6,30.839 17.1,30.839 18.6,30.839 20.1,30.839 21.6,30.839 23.1,30.839 26.1,30.839 27.6,30.839 29.1,30.839 30.6,30.839 32.1,30.839 38.1,30.839 40.438,30.83 90.361,30.964 87.476,31.104 34.177,31.473 76.637,32.114 1.344,32.33 5.223,32.339 6.6,32.339 9.6,32.339 11.1,32.339 21.6,32.339 27.6,32.339 29.1,32.339 30.6,32.339 32.1,32.339 38.1,32.339 40.438,32.33 80.1,32.339 81.6,32.339 83.1,32.339 33,32.613 16.078,32.734 11.803,32.937 58.189,33.13 79.612,33.409 85.052,33.422 54.738,33.464 18.86,33.74 34.177,33.773 2.1,33.839 5.223,33.839 6.6,33.839 9.6,33.839 11.1,33.839 15.6,33.839 21.6,33.839 22.772,33.839 24.272,33.839 25.772,33.839 27.272,33.839 28.786,33.839 30.6,33.839 32.1,33.839 38.1,33.839 40.438,33.83 81.6,33.839 73.036,34.15 62.009,34.464 79.612,34.67 27.968,34.74 33,34.913 30.593,34.977 68.088,35.237 41.687,35.269 1.344,35.33 15.6,35.339 21.6,35.339 38.1,35.339 81.6,35.339 84.6,35.339 44.05,35.634 46.448,35.634 48.814,35.705 79.61,35.944 18.886,36.101 24.923,36.491 27.223,36.487 33.497,36.634 1.344,36.83 15.6,36.839 21.6,36.839 38.1,36.839 39.6,36.839 50.1,36.839 80.1,36.839 81.6,36.839 84.6,36.839 41.873,37.201 45.963,37.222 12.28,37.31 23.777,37.355 26.077,37.355 28.369,37.355 51.468,37.385 58.199,37.9 18.809,38.19 2.1,38.339 5.223,38.339 6.6,38.339 9.6,38.339 11.1,38.339 38.1,38.339 39.6,38.339 41.1,38.339 51.6,38.339 80.1,38.339 81.6,38.339 84.6,38.339 34.177,38.353 64.181,38.416 48.729,38.5 76.748,38.718 29.005,38.782 30.242,38.782 31.68,38.782 52.955,38.905 32.967,38.928 47.458,39.482 52.214,39.509 70.318,39.672 75.659,39.701 67.479,39.743 1.344,39.83 5.223,39.839 6.6,39.839 9.6,39.839 14.1,39.839 38.1,39.839 39.6,39.839 41.1,39.839 48.6,39.839 81.6,39.839 84.6,39.839 32.464,40.226 50.827,40.222 64.414,40.365 34.177,40.653 65.512,40.718 63.211,40.775 53.476,41.094 81.994,41.33 2.1,41.339 5.223,41.339 6.6,41.339 9.6,41.339 12.6,41.339 14.1,41.339 18.747,41.339 20.1,41.339 21.6,41.339 23.1,41.339 24.6,41.339 32.1,41.339 33.6,41.339 38.1,41.339 39.6,41.339 41.1,41.339 84.6,41.339 54.814,41.774 55.493,41.774 56.157,41.774 57.364,41.775 58.93,41.774 59.587,41.774 60.243,41.774 60.899,41.774 61.547,41.774 49.109,41.813 75.801,42.004 16.634,42.239 32.934,42.316 66.019,42.345 68.04,42.345 69.032,42.345 70.047,42.345 71.073,42.345 24.767,42.751 27.067,42.751 29.359,42.751 81.994,42.83 2.1,42.839 21.6,42.839 23.1,42.839 33.6,42.839 38.1,42.839 39.6,42.839 41.1,42.839 44.1,42.839 75.6,42.839 84.6,42.839 72.506,43 79.772,43.133 49.109,43.273 62.221,43.388 51.111,43.422 55.824,43.429 56.621,43.429 57.411,43.429 58.179,43.429 58.946,43.429 59.737,43.429 60.534,43.429 25.913,43.614 28.213,43.619 75.642,43.911 62.221,44.045 55.824,44.226 56.621,44.226 57.411,44.226 58.179,44.226 58.946,44.226 59.737,44.226 60.534,44.226 73.772,44.33 81.994,44.33 2.1,44.339 5.223,44.339 12.6,44.339 14.1,44.339 17.1,44.339 18.6,44.339 21.6,44.339 23.1,44.339 24.6,44.339 27.6,44.339 29.1,44.339 84.6,44.339 54.775,44.435 79.772,44.506 32.941,44.599 62.221,44.701 55.824,45.017 56.621,45.017 57.411,45.017 58.179,45.017 58.946,45.017 59.737,45.017 60.534,45.017 38.132,45.195 78.894,45.179 64.062,45.726 57.411,45.784 58.179,45.784 58.946,45.784 59.737,45.784 60.534,45.784 76.63,45.83 79.772,45.83 81.994,45.83 2.1,45.839 5.223,45.839 6.6,45.839 15.6,45.839 17.1,45.839 18.6,45.839 21.6,45.839 23.1,45.839 24.6,45.839 26.1,45.839 27.6,45.839 29.1,45.839 30.6,45.839 32.1,45.839 33.6,45.839 39.6,45.839 84.6,45.839 43.621,46.198 62.222,46.275 54.787,46.296 58.179,46.552 58.946,46.552 59.737,46.552 60.534,46.552 62.222,46.904 48.729,47.158 54.127,47.222 54.787,47.222 79.772,47.33 81.994,47.33 2.1,47.339 5.223,47.339 6.6,47.339 9.6,47.339 11.1,47.339 12.6,47.339 15.6,47.339 17.1,47.339 18.6,47.339 20.1,47.339 21.6,47.339 23.1,47.339 24.6,47.339 26.1,47.339 27.6,47.339 29.1,47.339 30.6,47.339 32.1,47.339 33.6,47.339 44.1,47.339 58.179,47.342 58.946,47.342 59.737,47.342 60.534,47.342 84.6,47.339 40.386,47.508 42.013,47.516 62.222,47.541 45.501,47.606 52.26,47.938 6.041,48.308 9.06,48.532 44.537,48.6 2.1,48.839 3.6,48.839 11.1,48.839 12.6,48.839 15.6,48.839 17.1,48.839 18.6,48.839 20.1,48.839 21.6,48.839 23.1,48.839 24.6,48.839 26.1,48.839 27.6,48.839 29.1,48.839 30.6,48.839 32.1,48.839 33.6,48.839 64.085,48.853 79.772,48.83 81.994,48.83 84.6,48.839 42.013,49.158 56.245,49.135 58.16,49.135 60.119,49.135 62.101,49.135 59.932,49.777 54.419,49.798 55.911,49.798 42.811,49.939 73.63,50.167 2.1,50.339 3.6,50.339 12.6,50.339 20.1,50.339 27.6,50.339 29.1,50.339 30.6,50.339 32.1,50.339 33.6,50.339 44.1,50.339 79.772,50.33 81.994,50.33 84.6,50.339 17.56,50.365 21.456,50.365 7.644,50.466 63.126,50.819 64.969,50.819 52.732,50.909 49.74,50.946 16.776,51.275 20.466,51.275 75.35,51.437 76.76,51.448 54.349,51.531 58.471,51.662 60.829,51.662 57.095,51.7 2.1,51.839 3.6,51.839 12.6,51.839 27.6,51.839 29.1,51.839 30.6,51.839 79.772,51.83 81.994,51.83 84.6,51.839 47.197,51.88 50.844,51.992 67.107,52.012 23.914,52.042 21.456,52.185 17.827,52.276 7.547,52.347 25.524,52.362 64.256,52.381 45.834,52.779 47.197,52.779 75.76,52.83 74.043,52.925 49.74,53.06 60.829,53.157 57.249,53.179 16.751,53.267 2.1,53.339 3.6,53.339 12.6,53.339 15.6,53.339 27.6,53.339 29.1,53.339 30.6,53.339 81.994,53.33 84.6,53.339 67.107,53.402 47.637,53.597 21.451,53.693 22.401,53.693 25.155,53.901 62.956,54.047 79.384,54.203 21.926,54.318 7.547,54.348 60.933,54.621 67.107,54.792 2.1,54.839 3.6,54.839 12.6,54.839 15.6,54.839 29.1,54.839 30.6,54.839 41.1,54.839 81.994,54.83 84.6,54.839 21.451,54.918 22.401,54.918 75.873,55.243 8.45,55.4 6.644,55.413 78.473,55.651 74.038,55.699 52.445,55.935 54.722,55.935 66.172,55.925 16.751,55.956 21.431,55.957 19.028,56.034 25.536,56.035 2.1,56.339 3.6,56.339 12.6,56.339 29.1,56.339 30.6,56.339 41.1,56.339 42.6,56.339 84.6,56.339 7.547,56.472 20.276,56.849 43.772,57.273 53.21,57.273 60.786,57.603 63.12,57.603 76.42,57.645 2.1,57.839 3.6,57.839 14.1,57.839 15.6,57.839 17.1,57.839 20.1,57.839 29.1,57.839 30.6,57.839 33.6,57.839 36.6,57.839 38.1,57.839 84.6,57.839 55.821,58.472 65.172,58.48 77.595,58.64 82.678,58.828 2.1,59.339 3.6,59.339 6.6,59.339 8.1,59.339 12.6,59.339 21.6,59.339 23.1,59.339 24.6,59.339 26.1,59.339 29.1,59.339 30.6,59.339 35.1,59.339 39.6,59.339 41.1,59.339 42.6,59.339 44.1,59.339 45.6,59.339 47.1,59.339 48.6,59.339 50.1,59.339 51.6,59.339 53.1,59.339 84.6,59.339 73.687,59.719 65.172,60.024 68.579,60.169 15.233,60.234 18.233,60.234 55.208,60.391 79.059,60.615 75.032,60.675 2.1,60.839 3.6,60.839 5.1,60.839 8.1,60.839 9.6,60.839 12.6,60.839 23.1,60.839 24.6,60.839 26.1,60.839 30.6,60.839 32.1,60.839 33.6,60.839 35.1,60.839 36.6,60.839 38.1,60.839 39.6,60.839 41.1,60.839 84.6,60.839 69.386,61.166 56.269,61.452 49.355,61.466 50.855,61.466 52.354,61.466 65.172,61.548 17.953,61.872 72.196,61.926 76.276,62.001 50.1,62.036 51.599,62.036 53.099,62.036 2.1,62.339 3.6,62.339 5.1,62.339 6.6,62.339 9.6,62.339 12.6,62.339 15.187,62.339 24.6,62.339 26.1,62.339 27.6,62.339 83.1,62.339 84.6,62.339 42.682,62.365 57.33,62.513 45.285,62.803 0.867,62.843 65.172,63.201 81.081,63.25 79.102,63.405 58.435,63.529 19.725,63.547 70.164,63.68 71.326,63.68 77.82,63.681 1.885,63.752 3.236,63.752 35.1,63.839 42.6,63.839 44.1,63.839 45.6,63.839 48.6,63.839 83.1,63.839 84.6,63.839 51.091,63.955 85.773,64.1 87.272,64.1 88.773,64.1 92.1,64.1 94.308,64.1 96.272,64.1 4.294,64.222 0.867,64.343 8.429,64.409 61.845,64.406 29.588,64.447 5.157,64.5 5.8,64.5 6.481,64.5 71.707,64.542 15.143,64.574 24.845,64.633 59.451,64.634 53.95,64.816 70.164,64.877 18.308,65.018 21.486,65.013 19.545,65.243 27.6,65.339 30.6,65.339 41.1,65.339 44.1,65.339 45.6,65.339 62.1,65.339 63.6,65.339 65.1,65.339 15.767,65.487 5.157,65.683 5.8,65.683 6.481,65.683 60.512,65.695 0.867,65.843 70.276,66.037 91.853,66.062 57.103,66.164 4.294,66.272 93.309,66.542 61.573,66.778 98.669,66.83 5.1,66.839 6.6,66.839 42.6,66.839 44.1,66.839 45.6,66.839 47.1,66.839 63.6,66.839 65.1,66.839 81.6,66.839 83.1,66.839 84.6,66.839 86.1,66.839 87.6,66.839 96.6,66.839 66.901,67.218 73.815,67.218 0.867,67.343 50.76,67.379 52.999,67.372 54.86,67.413 23.491,67.637 27.012,67.645 28.691,67.645 30.259,67.645 1.885,67.69 2.561,67.69 3.236,67.69 58.549,67.86 89.229,67.878 17.952,67.943 98.669,68.33 5.1,68.339 6.6,68.339 8.616,68.339 9.6,68.339 12.6,68.339 14.1,68.339 15.6,68.339 21.6,68.339 23.1,68.339 24.6,68.339 33.6,68.339 38.1,68.339 63.6,68.339 81.6,68.339 83.1,68.339 84.6,68.339 86.1,68.339 87.6,68.339 92.1,68.339 93.6,68.339 95.1,68.339 96.6,68.339 68.095,68.398 68.863,68.398 69.63,68.398 70.398,68.398 71.165,68.398 71.932,68.398 72.7,68.398 39.738,68.451 64.612,68.505 0.867,68.843 56.966,69.07 68.095,69.166 68.863,69.166 69.63,69.166 70.398,69.166 71.165,69.166 71.932,69.166 72.7,69.166 65.972,69.203 50.76,69.647 52.982,69.647 20.424,69.668 1.885,69.767 2.561,69.767 3.236,69.767 32.859,69.766 98.669,69.83 5.1,69.839 6.6,69.839 12.6,69.839 14.1,69.839 21.6,69.839 23.1,69.839 26.1,69.839 27.6,69.839 29.1,69.839 41.1,69.839 42.6,69.839 44.1,69.839 45.6,69.839 47.1,69.839 54.6,69.839 81.6,69.839 83.1,69.839 84.6,69.839 86.1,69.839 87.6,69.839 89.1,69.839 92.1,69.839 93.6,69.839 95.1,69.839 96.6,69.839 8.616,69.888 68.095,69.933 68.863,69.933 69.63,69.933 70.398,69.933 71.165,69.933 71.932,69.933 72.7,69.933 17.952,70.045 15.369,70.234 0.867,70.343 62.24,70.498 68.095,70.701 68.863,70.701 69.63,70.701 71.165,70.701 71.932,70.701 72.7,70.701 4.294,71.177 98.669,71.33 26.1,71.339 27.6,71.339 29.1,71.339 31.021,71.339 32.64,71.339 35.1,71.339 39.6,71.339 44.1,71.339 45.6,71.339 81.6,71.339 83.1,71.339 84.6,71.339 86.1,71.339 87.6,71.339 89.1,71.339 92.1,71.339 56.966,71.366 68.095,71.468 68.863,71.468 69.63,71.468 70.398,71.468 71.165,71.468 71.932,71.468 72.7,71.468 58.492,71.667 0.867,71.843 5.157,71.905 5.801,71.905 6.482,71.905 68.095,72.235 68.863,72.235 69.63,72.235 70.398,72.235 71.165,72.235 71.932,72.235 72.7,72.235 57.537,72.442 17.759,72.698 60.152,72.729 20.759,72.794 10.654,72.851 26.1,72.839 27.6,72.839 29.1,72.839 31.021,72.839 32.64,72.839 41.1,72.839 44.1,72.839 45.6,72.839 48.6,72.839 77.1,72.839 78.6,72.839 81.6,72.839 83.1,72.839 84.6,72.839 86.1,72.839 87.6,72.839 89.1,72.839 68.863,73.003 69.63,73.003 70.398,73.003 71.932,73.003 72.7,73.003 50.99,73.053 5.157,73.092 5.801,73.092 6.481,73.092 22.783,73.145 4.294,73.227 12.735,73.221 61.359,73.303 66.3,73.314 0.867,73.343 1.885,73.705 3.236,73.705 19.836,74.12 65.692,74.11 58.83,74.158 56.966,74.294 5.1,74.339 6.6,74.339 9.6,74.339 10.821,74.336 26.1,74.339 27.6,74.339 29.1,74.339 31.021,74.339 32.64,74.339 38.124,74.344 74.1,74.339 77.1,74.339 78.6,74.339 81.6,74.339 83.1,74.339 84.6,74.339 86.1,74.339 87.6,74.339 34.298,74.449 35.857,74.449 61.359,74.487 66.857,74.563 15.437,74.906 89.251,74.951 50.663,75.105 55.002,75.097 52.952,75.121 71.88,75.186 72.895,75.205 0.906,75.83 2.1,75.839 3.6,75.839 5.1,75.839 6.6,75.839 11.1,75.839 12.6,75.839 20.1,75.839 21.6,75.839 23.1,75.839 24.6,75.839 26.1,75.839 41.1,75.839 42.6,75.839 44.1,75.839 45.874,75.839 47.1,75.839 62.1,75.839 63.6,75.839 65.1,75.839 66.6,75.839 75.6,75.839 77.1,75.839 78.6,75.839 81.6,75.839 83.1,75.839 84.6,75.839 86.1,75.839 87.6,75.839 89.1,75.839 38.269,76.309 15.542,76.352 17.085,76.352 18.39,76.352 56.966,77.052 50.759,77.25 34.542,77.301 0.906,77.33 2.1,77.339 5.1,77.339 27.6,77.339 29.1,77.339 31.021,77.339 39.6,77.339 42.6,77.339 44.1,77.339 45.874,77.339 48.6,77.339 69.6,77.339 71.1,77.339 72.6,77.339 74.1,77.339 75.6,77.339 77.1,77.339 78.6,77.339 80.1,77.339 83.1,77.339 84.6,77.339 86.1,77.339 87.6,77.339 89.1,77.339 92.1,77.339 59.727,77.942 1.885,78.746 3.236,78.746 89.235,78.764 0.906,78.83 9.6,78.839 15.6,78.839 17.1,78.839 18.6,78.839 20.1,78.839 21.6,78.839 23.1,78.839 26.1,78.839 27.6,78.839 30.6,78.839 39.6,78.839 41.1,78.839 44.1,78.839 45.874,78.839 62.1,78.839 63.6,78.839 68.1,78.839 69.6,78.839 71.1,78.839 72.6,78.839 74.1,78.839 75.6,78.839 77.1,78.839 78.6,78.839 80.1,78.839 81.6,78.839 84.6,78.839 86.1,78.839 87.6,78.839 92.1,78.839 93.6,78.839 65.1,78.971 66.6,78.971 57.635,79.023 58.379,79.725 51.232,80.117 55.18,80.292 0.906,80.33 11.1,80.339 23.1,80.339 26.1,80.339 27.6,80.339 29.1,80.339 33.6,80.339 35.1,80.339 36.6,80.339 41.1,80.339 42.6,80.339 44.1,80.339 45.874,80.339 47.1,80.339 57.6,80.339 60.6,80.339 62.1,80.339 63.6,80.339 65.1,80.339 66.6,80.339 68.1,80.339 69.6,80.339 71.1,80.339 72.6,80.339 74.1,80.339 75.6,80.339 77.1,80.339 78.6,80.339 80.1,80.339 81.6,80.339 83.1,80.339 86.1,80.339 87.6,80.339 89.1,80.339 92.1,80.339 93.6,80.339 95.1,80.339 96.6,80.339 98.1,80.339 5.064,81.365 1.885,81.746 2.561,81.746 3.236,81.746 0.906,81.83 11.1,81.839 12.6,81.839 14.1,81.839 21.6,81.839 23.1,81.839 30.6,81.839 33.6,81.839 35.1,81.839 36.6,81.839 38.1,81.839 41.1,81.839 42.6,81.839 44.1,81.839 45.874,81.839 47.1,81.839 48.6,81.839 50.1,81.839 54.6,81.839 56.1,81.839 57.6,81.839 60.6,81.839 62.1,81.839 63.6,81.839 65.1,81.839 66.6,81.839 68.1,81.839 69.6,81.839 71.1,81.839 72.6,81.839 74.1,81.839 75.6,81.839 77.1,81.839 78.6,81.839 80.1,81.839 81.6,81.839 83.1,81.839 84.6,81.839 87.6,81.839 89.1,81.839 98.1,81.839 52.773,81.904 26.284,82.063 0.906,83.33 18.6,83.339 21.6,83.339 29.1,83.339 30.6,83.339 33.6,83.339 35.1,83.339 36.6,83.339 38.1,83.339 39.6,83.339 42.6,83.339 44.1,83.339 45.874,83.339 47.1,83.339 56.1,83.339 59.1,83.339 60.6,83.339 62.1,83.339 63.6,83.339 65.1,83.339 66.6,83.339 68.1,83.339 69.6,83.339 71.1,83.339 72.6,83.339 74.1,83.339 75.6,83.339 77.1,83.339 78.6,83.339 80.1,83.339 81.6,83.339 83.1,83.339 84.6,83.339 86.1,83.339 89.1,83.339 90.6,83.339 92.1,83.339 93.6,83.339 98.1,83.339 24.108,83.41 4.554,83.628 6.816,83.628 9.12,83.628 1.885,83.659 2.561,83.659 3.236,83.659 12.081,84.246 14.219,84.684 16.19,84.705 0.906,84.83 18.6,84.839 33.6,84.839 35.1,84.839 36.6,84.839 38.1,84.839 39.6,84.839 41.1,84.839 44.1,84.839 45.874,84.839 56.1,84.839 59.1,84.839 60.6,84.839 62.1,84.839 63.6,84.839 65.1,84.839 66.6,84.839 68.1,84.839 69.6,84.839 71.1,84.839 72.6,84.839 74.1,84.839 75.6,84.839 77.1,84.839 78.6,84.839 80.1,84.839 81.6,84.839 83.1,84.839 84.6,84.839 86.1,84.839 90.6,84.839 92.1,84.839 98.1,84.839 12.081,85.067 25.907,85.564 6.693,85.676 8.832,85.676 32.975,86.006 48.825,86.009 0.906,86.33 4.28,86.33 14.1,86.339 21.6,86.339 27.6,86.339 29.1,86.339 36.6,86.339 38.1,86.339 39.6,86.339 41.1,86.339 42.6,86.339 44.1,86.339 45.874,86.339 56.1,86.339 59.1,86.339 60.6,86.339 62.1,86.339 63.6,86.339 65.1,86.339 66.6,86.339 68.1,86.339 69.6,86.339 71.1,86.339 72.6,86.339 74.1,86.339 75.6,86.339 77.1,86.339 78.6,86.339 80.1,86.339 81.6,86.339 83.1,86.339 84.6,86.339 86.1,86.339 89.1,86.339 98.1,86.339 30.632,86.35 51.227,86.384 1.885,86.659 2.561,86.659 91.012,86.941 0.906,87.83 2.1,87.839 9.6,87.839 14.1,87.839 18.6,87.839 23.1,87.839 26.1,87.839 27.6,87.839 38.1,87.839 39.6,87.839 41.1,87.839 42.6,87.839 44.1,87.839 56.1,87.839 57.6,87.839 59.1,87.839 60.6,87.839 62.1,87.839 63.6,87.839 65.1,87.839 66.6,87.839 68.1,87.839 69.6,87.839 71.1,87.839 72.6,87.839 74.1,87.839 75.6,87.839 77.1,87.839 78.6,87.839 80.1,87.839 81.6,87.839 83.1,87.839 84.6,87.839 86.1,87.839 89.1,87.839 93.6,87.839 95.1,87.839 96.6,87.839 98.1,87.839 32.308,87.948 36.031,88.029 30.64,88.152 47.37,88.396 2.1,89.339 8.1,89.339 12.6,89.339 14.1,89.339 17.1,89.339 18.6,89.339 21.6,89.339 39.6,89.339 41.1,89.339 48.6,89.339 50.1,89.339 51.6,89.339 53.1,89.339 54.6,89.339 56.1,89.339 57.6,89.339 59.1,89.339 60.6,89.339 63.6,89.339 65.1,89.339 66.6,89.339 68.1,89.339 69.6,89.339 71.1,89.339 72.6,89.339 74.1,89.339 75.6,89.339 77.1,89.339 78.6,89.339 80.1,89.339 81.6,89.339 83.1,89.339 84.6,89.339 86.1,89.339 89.1,89.339 90.6,89.339 93.6,89.339 95.1,89.339 96.6,89.339 98.1,89.339 38.234,90.339 3.6,90.839 11.1,90.839 14.1,90.839 21.6,90.839 23.1,90.839 29.1,90.839 30.6,90.839 33.6,90.839 50.1,90.839 51.6,90.839 53.1,90.839 54.6,90.839 56.1,90.839 57.6,90.839 59.1,90.839 62.1,90.839 63.6,90.839 81.6,90.839 83.1,90.839 84.6,90.839 86.1,90.839 93.6,90.839 95.1,90.839 96.6,90.839 98.1,90.839 9.148,92.114 3.6,92.339 12.6,92.339 14.1,92.339 17.1,92.339 18.6,92.339 20.1,92.339 21.6,92.339 23.1,92.339 24.6,92.339 26.1,92.339 29.1,92.339 30.6,92.339 32.1,92.339 33.6,92.339 50.1,92.339 51.6,92.339 53.1,92.339 54.6,92.339 56.1,92.339 57.6,92.339 59.1,92.339 60.6,92.339 62.1,92.339 63.6,92.339 65.1,92.339 68.1,92.339 69.6,92.339 72.6,92.339 78.6,92.339 81.6,92.339 83.1,92.339 84.6,92.339 86.1,92.339 93.6,92.339 95.1,92.339 96.6,92.339 98.1,92.339 39.469,92.412 7.097,92.914 37.235,93.043 77.388,93.421 68.888,93.437 2.1,93.839 3.6,93.839 5.1,93.839 11.1,93.839 12.6,93.839 14.1,93.839 17.1,93.839 18.6,93.839 20.1,93.839 21.6,93.839 23.1,93.839 24.6,93.839 26.1,93.839 50.1,93.839 51.6,93.839 53.1,93.839 59.1,93.839 60.6,93.839 62.1,93.839 63.6,93.839 65.1,93.839 72.6,93.839 81.6,93.839 83.1,93.839 89.1,93.839 90.6,93.839 96.6,93.839 98.1,93.839 34.613,94.19 78.483,94.639 68.858,94.951 76.276,94.933 2.1,95.339 3.6,95.339 5.1,95.339 11.1,95.339 14.1,95.339 18.6,95.339 21.6,95.339 23.1,95.339 24.6,95.339 26.1,95.339 41.1,95.339 54.6,95.339 60.6,95.339 62.1,95.339 65.1,95.339 72.6,95.339 77.1,95.339 81.6,95.339 83.1,95.339 89.1,95.339 90.6,95.339 96.6,95.339 98.1,95.339 51.813,95.425 9.084,95.614 38.38,95.61 31.866,95.856 33.349,95.998 35.676,96.016 30.126,96.072 53.142,96.272 55.729,96.354 42.731,96.737 68.869,96.782 3.6,96.839 14.1,96.839 15.6,96.839 21.6,96.839 23.1,96.839 39.6,96.839 72.6,96.839 77.1,96.839 81.6,96.839 83.1,96.839 89.1,96.839 90.6,96.839 96.6,96.839 98.1,96.839 58.475,96.897 62.877,96.897 33.383,97.582 31.798,97.67 74.81,97.881 69.847,98.051 41.027,98.156 3.6,98.339 9.6,98.339 11.1,98.339 12.6,98.339 14.1,98.339 15.6,98.339 17.1,98.339 18.6,98.339 20.1,98.339 21.6,98.339 23.1,98.339 24.6,98.339 26.1,98.339 27.6,98.339 29.1,98.339 36.6,98.339 38.1,98.339 53.1,98.339 54.6,98.339 60.6,98.339 62.1,98.339 78.6,98.339 80.1,98.339 81.6,98.339 83.1,98.339 84.6,98.339 86.1,98.339 87.6,98.339 89.1,98.339 90.6,98.339 92.1,98.339 93.6,98.339 95.1,98.339 96.6,98.339 98.1,98.339 6.585,99.166 33.525,99.16 51.016,99.15 55.901,99.161
GND_ISO: C35.1 C36.1 C38.1 C40.1 C43.1 DD2.8 DD3.9 DD4.4 X9.3 X9.5 X9.10 X9.12 X9.14 X9.17 X9.19 X9.20 | length 2.5
  Top Layer w0.2: 91.793,44.363 X9.5@92.517,44.363 ; X9.17@92.517,39.563 93.953,39.563 94.146,39.369 v1@94.254,39.369
  other v1: 91.772,30.864 93.272,30.864 94.772,30.864 96.272,30.864 97.772,30.864 86.411,32.33 88.922,32.33 91.772,32.364 93.272,32.364 94.772,32.364 96.272,32.364 97.772,32.364 86.161,33.397 93.272,33.864 94.772,33.864 96.272,33.864 97.772,33.864 86.161,34.667 93.272,35.364 94.772,35.364 96.272,35.364 97.772,35.364 86.161,35.938 96.272,36.864 88.779,37.85 92.435,38.162 94.772,38.364 96.272,38.364 97.772,38.364 86.198,38.484 94.35,39.369 96.272,39.864 97.772,39.864 93.656,41.158 97.772,41.364 88.534,41.795 93.656,41.957 93.656,42.774 86.067,42.83 97.772,42.864 89.23,43.485 90.876,44.152 97.772,44.364 89.428,44.625 93.656,44.824 93.656,45.76 86.067,45.83 97.772,45.864 86.195,47.233 86.195,48.492 91.772,48.864 86.195,49.775 90.272,50.364 91.772,50.364 93.272,50.364 97.772,50.364 90.272,51.864 91.772,51.864 93.272,51.864 97.772,51.864 90.272,53.364 91.772,53.364 93.272,53.364 97.772,53.364 86.006,54.83 89.07,54.84 90.272,54.864 91.772,54.864 93.272,54.864 97.772,54.864 87.651,55.676 90.272,56.364 91.772,56.364 93.272,56.364 97.772,56.364 86.026,57.528 90.272,57.864 91.772,57.864 97.772,57.864 96.272,59.364 97.772,59.364 96.272,60.864 97.772,60.864 85.852,61.577 90.272,62.364 91.772,62.364 93.272,62.364 94.772,62.364 96.272,62.364 97.772,62.364 88.227,62.637 86.931,63.161
IN0_BCLK: DD6.57
IN0_LRCLK: DD6.58
IN0_SDATA: DD6.59
IN1_BCLK: DD6.60 R22.1 | length 14
  Top Layer w0.281: DD6.60@63.129,44.034 63.482,44.034 cw(c63.482,42.999) 64.213,43.731
  Top Layer w0.35: 64.213,43.731 ccw(c65.13,44.647) 65.13,43.351 69.912,43.351 ccw(c69.912,45.891) 71.708,44.095 74.356,46.743 cw(c75.55,45.549) R22.1@75.55,47.238
IN1_LRCLK: DD6.61 R23.1 | length 14.1
  Top Layer w0.281: DD6.61@63.129,44.534 64.06,44.534 cw(c64.06,44.073) 64.386,44.399
  Top Layer w0.35: 64.386,44.399 ccw(c64.711,44.724) 64.711,44.264 69.421,44.264 ccw(c69.421,46.804) 71.217,45.008 74.144,47.934 cw(c75.55,46.528) R23.1@75.55,48.517
IN1_SDATA: DD6.62 R24.1 | length 14.2
  Top Layer w0.281: DD6.62@63.129,45.034 64.314,45.034
  Top Layer w0.35: 64.314,45.034 68.778,45.034 ccw(c68.778,47.574) 70.574,45.777 73.902,49.106 cw(c75.55,47.457) R24.1@75.55,49.788
IN2_BCLK: DD6.65 R76.1 | length 36.5
  Top Layer w0.281: DD6.65@62.985,46.533 63.917,46.533 cw(c63.917,46.072) 64.242,46.398
  Top Layer w0.3: DD6.65@63.129,46.534 63.797,46.534
  Top Layer w0.35: 64.305,46.335 68.493,46.335 ccw(c68.493,48.875) 70.289,47.079 72.055,48.844 ccw(c70.259,50.64) 72.631,49.732 ccw(c70.259,50.64) 72.731,50.056 ccw(c70.259,50.64) 72.798,50.612 ccw(c70.259,50.64) 72.799,50.64 72.799,51.925 72.799,52.1 ccw(c72.374,52.1) 72.374,52.525 71.975,52.525 cw(c71.975,52.95) 71.55,52.95 cw(c71.975,52.95) 71.975,53.375 72.491,53.375 ccw(c72.491,53.8) 72.916,53.8 ccw(c72.491,53.8) 72.491,54.225 71.975,54.225 cw(c71.975,54.65) 71.55,54.65 cw(c71.975,54.65) 71.975,55.075 72.491,55.075 ccw(c72.491,55.5) 72.916,55.5 ccw(c72.491,55.5) 72.491,55.925 71.975,55.925 cw(c71.975,56.35) 71.55,56.35 cw(c71.975,56.35) 71.975,56.775 72.374,56.775 ccw(c72.374,57.2) 72.799,57.2 72.799,58.094 72.799,58.146 ccw(c71.468,58.146) 72.409,59.087 71.844,59.652 cw(c73.541,61.349) 71.141,61.349 cw(c72.676,61.349) 71.591,62.434 75.034,65.877 ccw(c74.351,66.559) R76.1@75.316,66.559